# EAGLE board PCB_2 (EAGLE 6.5.0)
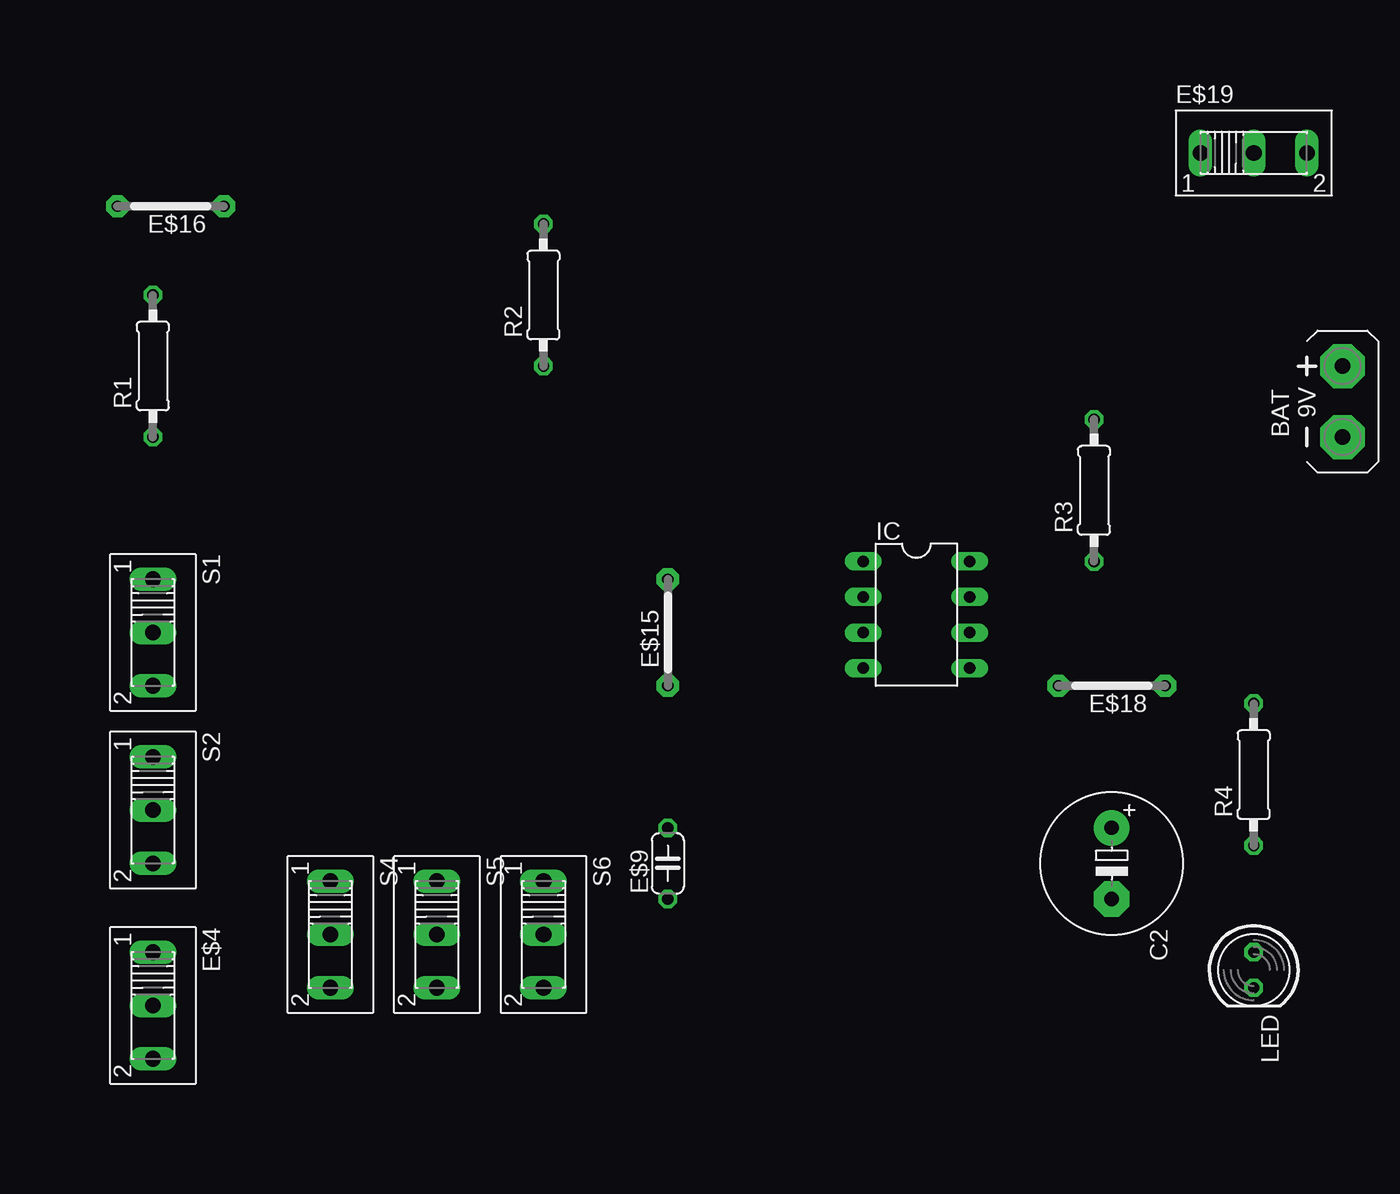
[diagram p0: board, top side]
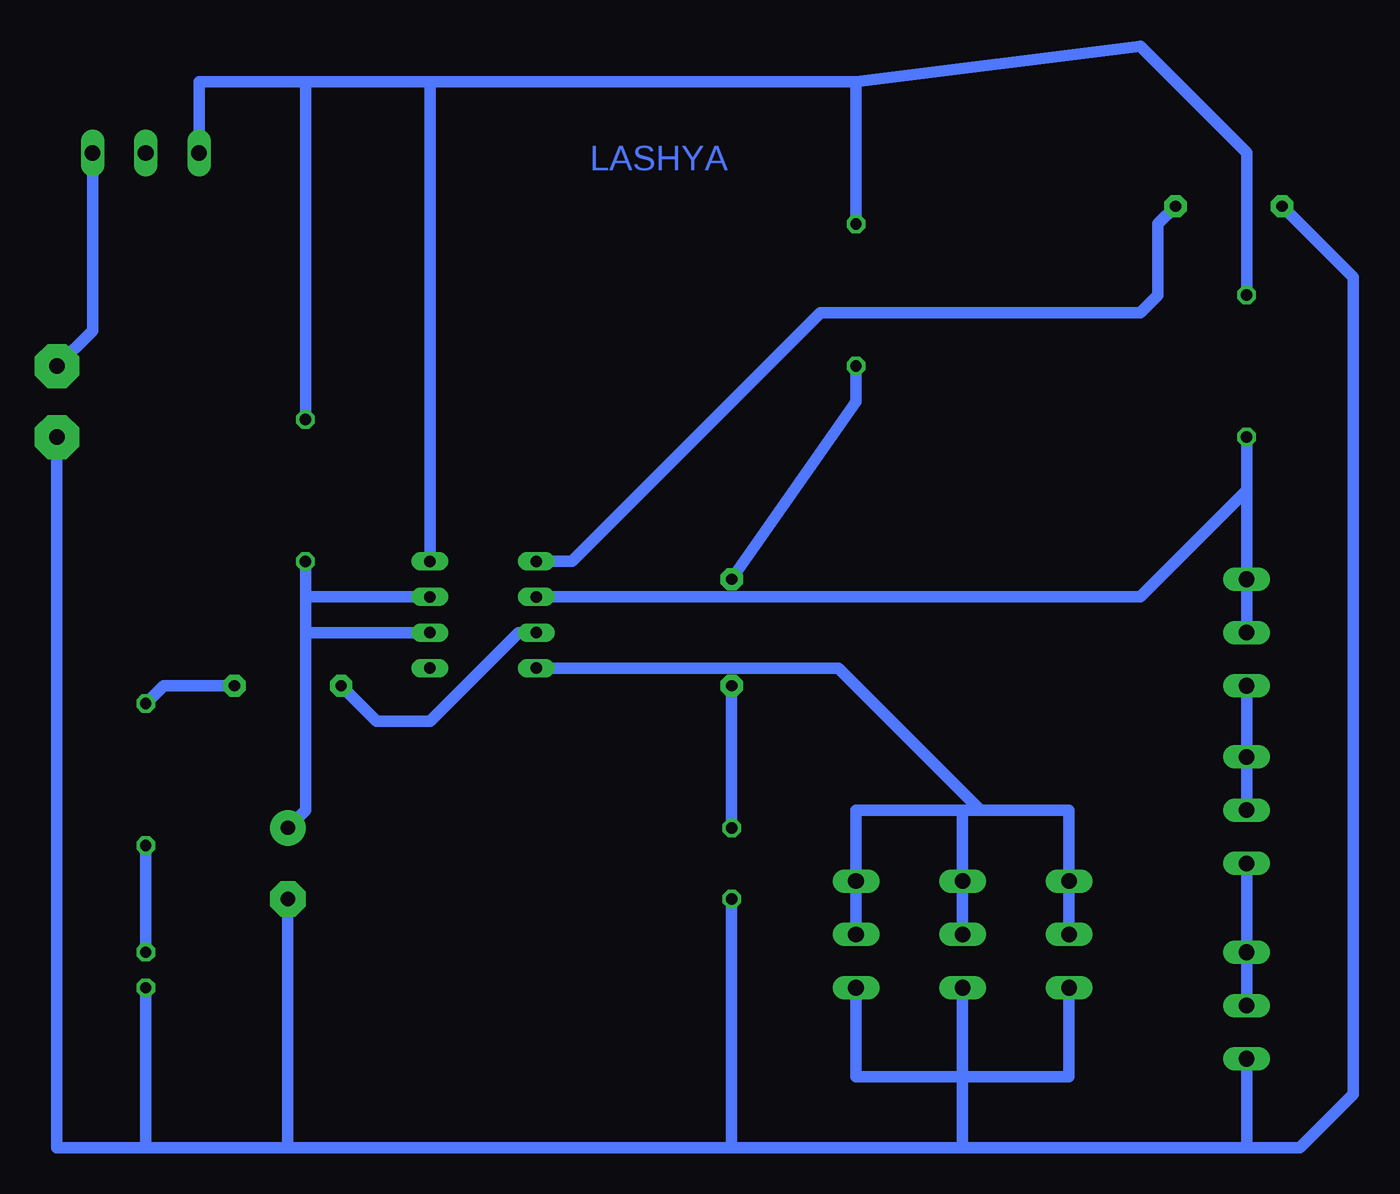
[diagram p1: board, bottom side, seen from below]

No outline drawn. Coordinates in mm, seen from the top.
Copper layers (1*16): Top 0.035mm / dielectric 1.5mm / Bottom 0.035mm
Design rules "default": minimum track width 10mil, minimum drill 24mil, track to track 8mil, track to pad 8mil, pad to pad 8mil, via to via 8mil, smd to smd 8mil, copper to edge 40mil, drill to drill 8mil, minimum pad ring 10mil, minimum via ring 8mil, stop-mask expansion 4mil, vias tented up to drill 0mil, thermal gap 10mil

## Footprints (pad centres in the part's own frame; a part is rotated, then mirrored left to right if it is on the bottom)
AB9V = drill 1.118 pad 3.15 octagon: + 0,2.54; - 0,-2.54
E5-10,5 = drill 1.016 pad 2.54: + -2.54,0 | drill 1.016 pad 2.54 octagon: - 2.54,0
255SB = drill 1.118 long: 1 -3.81,0; 2 0,0; 3 3.81,0
C050-024X044 = drill 0.813 octagon: 1 -2.54,0; 2 2.54,0
07 = drill 0.813 pad 1.6 octagon: 1 -3.81,0; 2 3.81,0
DIL08 = drill 0.813 long: 1 -3.81,-3.81; 2 -1.27,-3.81; 3 1.27,-3.81; 4 3.81,-3.81; 5 3.81,3.81; 6 1.27,3.81; 7 -1.27,3.81; 8 -3.81,3.81
LED5MM = drill 0.813 octagon: A -1.27,0; K 1.27,0
0207/10 = drill 0.813 octagon: 1 -5.08,0; 2 5.08,0

## Placement (x,y rotation side)
BAT  [AB9V]  97.79,63.5 0 top
C2  1uF  [E5-10,5]  81.28,30.48 270 top
E$4  [255SB]  12.7,20.32 270 top
E$9  0.1uf  [C050-024X044]  49.53,30.48 90 top
E$15  [07]  49.53,46.99 90 top
E$16  [07]  13.97,77.47 180 top
E$18  [07]  81.28,43.18 180 top
E$19  [255SB]  91.44,81.28 0 top
IC  555  [DIL08]  67.31,48.26 270 top
LED  [LED5MM]  91.44,22.86 270 top
R1  100K  [0207/10]  12.7,66.04 90 top
R2  100K  [0207/10]  40.64,71.12 90 top
R3  1M  [0207/10]  80.01,57.15 90 top
R4  470  [0207/10]  91.44,36.83 90 top
S1  [255SB]  12.7,46.99 270 top
S2  [255SB]  12.7,34.29 270 top
S4  [255SB]  25.4,25.4 270 top
S5  [255SB]  33.02,25.4 270 top
S6  [255SB]  40.64,25.4 270 top

## Library data of the parts
BAT = battery
C2 E$9 R1-R4 = resistor
E$4 E$19 S1 S2 S4-S6 = switch
E$15 E$16 E$18 = jumper
IC = ic-package
LED = led

## Nets
C1: BAT.- C2.- E$4.3 E$9.1 E$16.2 LED.K S4.3 S5.3 S6.3
S3: E$4.1 E$4.2 S2.3
S$1: IC.2 R1.1 S1.1 S1.2
S$2: S1.3 S2.1 S2.2
S$4: IC.4 S4.1 S4.2 S5.1 S5.2 S6.1 S6.2
S$5: C2.+ IC.6 IC.7 R3.1
S$8: E$15.2 R2.1
S$9: E$9.2 E$15.1
S$10: BAT.+ E$19.3
S$11: E$16.1 IC.1
S$12: E$18.2 IC.3
S$13: E$18.1 R4.2
S$14: LED.A R4.1
SWITCH: E$19.1 IC.8 R1.2 R2.2 R3.2

## Tracks (layer width: path | path; a pad name or v marks a point on that pad's centre or on a via)
C1
  Bottom 0.813: S6.3 40.64,15.24 33.02,15.24 | S5.3 33.02,15.24 | S4.3 25.4,15.24 33.02,15.24 | E$4.3 12.7,10.16 | 12.7,10.16 33.02,10.16 | 33.02,10.16 49.53,10.16 | 49.53,10.16 81.28,10.16 | 81.28,10.16 91.44,10.16 | 91.44,10.16 97.79,10.16 BAT.- | C2.- 81.28,10.16 | 12.7,10.16 8.89,10.16 5.08,13.97 5.08,72.39 E$16.2 | LED.K 91.44,10.16 | E$9.1 49.53,10.16 | 33.02,15.24 33.02,10.16
S3
  Bottom 0.813: E$4.2 E$4.1 S2.3
S$1
  Bottom 0.813: S1.2 S1.1 12.7,57.15 | R1.1 12.7,57.15 | IC.2 20.32,49.53 12.7,57.15
S$2
  Bottom 0.813: S2.2 S2.1 S1.3
S$4
  Bottom 0.813: S4.2 S4.1 25.4,34.29 31.75,34.29 | 31.75,34.29 33.02,34.29 | 33.02,34.29 40.64,34.29 S6.1 S6.2 | S5.2 S5.1 33.02,34.29 | IC.4 41.91,44.45 31.75,34.29
S$5
  Bottom 0.813: R3.1 80.01,49.53 | 80.01,49.53 80.01,46.99 | 80.01,46.99 80.01,34.29 C2.+ | IC.6 80.01,46.99 | IC.7 80.01,49.53
S$8
  Bottom 0.813: R2.1 40.64,63.5 E$15.2
S$9
  Bottom 0.813: E$15.1 E$9.2
S$10
  Bottom 0.813: E$19.3 95.25,68.58 BAT.+
S$11
  Bottom 0.813: IC.1 60.96,52.07 43.18,69.85 20.32,69.85 19.05,71.12 19.05,76.2 E$16.1
S$12
  Bottom 0.813: IC.3 64.77,46.99 71.12,40.64 74.93,40.64 E$18.2
S$13
  Bottom 0.813: E$18.1 90.17,43.18 R4.2
S$14
  Bottom 0.813: R4.1 LED.A
SWITCH
  Bottom 0.813: E$19.1 87.63,86.36 80.01,86.36 | R1.2 12.7,81.28 20.32,88.9 40.64,86.36 | 40.64,86.36 71.12,86.36 | 71.12,86.36 80.01,86.36 | R2.2 40.64,86.36 | R3.2 80.01,86.36 | IC.8 71.12,86.36

## Text on the board
Bottom: LASHYA